# Altium PCB PCB_C20003-A.PcbDoc (part 1 of 2)
Units mil, origin at the board's own origin, x right, y up, seen from the top; angles counter-clockwise.
Board outline 2450.31 x 1640 mil, 2 copper layers (Top, Bottom), stack 12.7 mil thick; 109 components, 60 nets, 279 pads, 480 vias.
Unrouted connection lines stored in the file: 1.
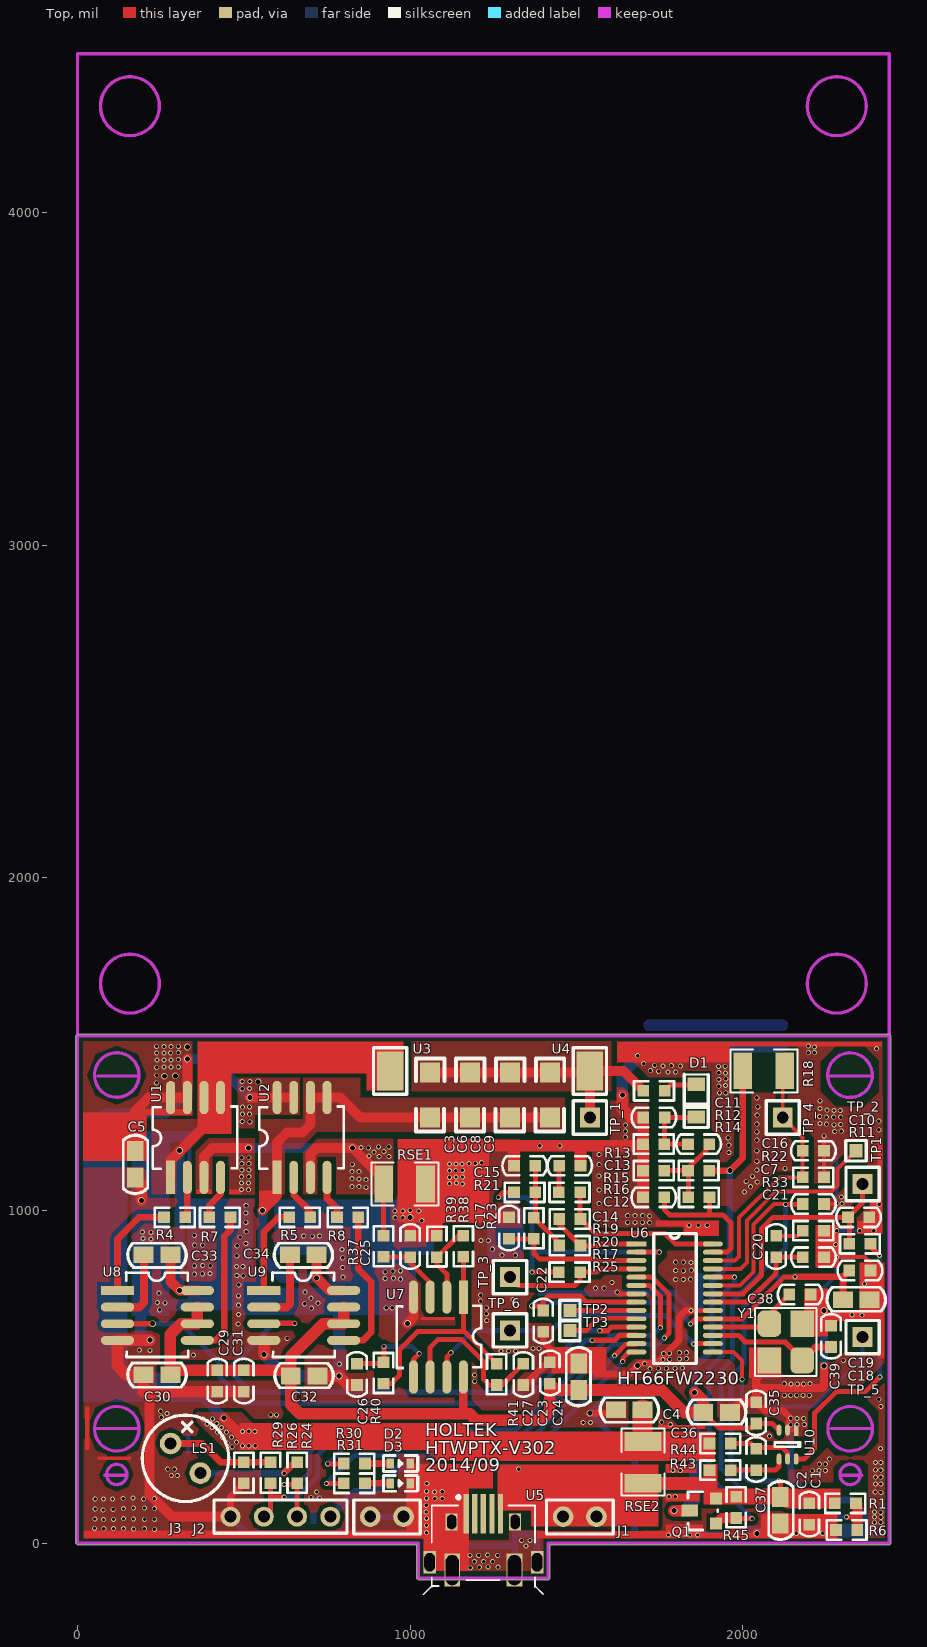
[diagram p0: Top view]
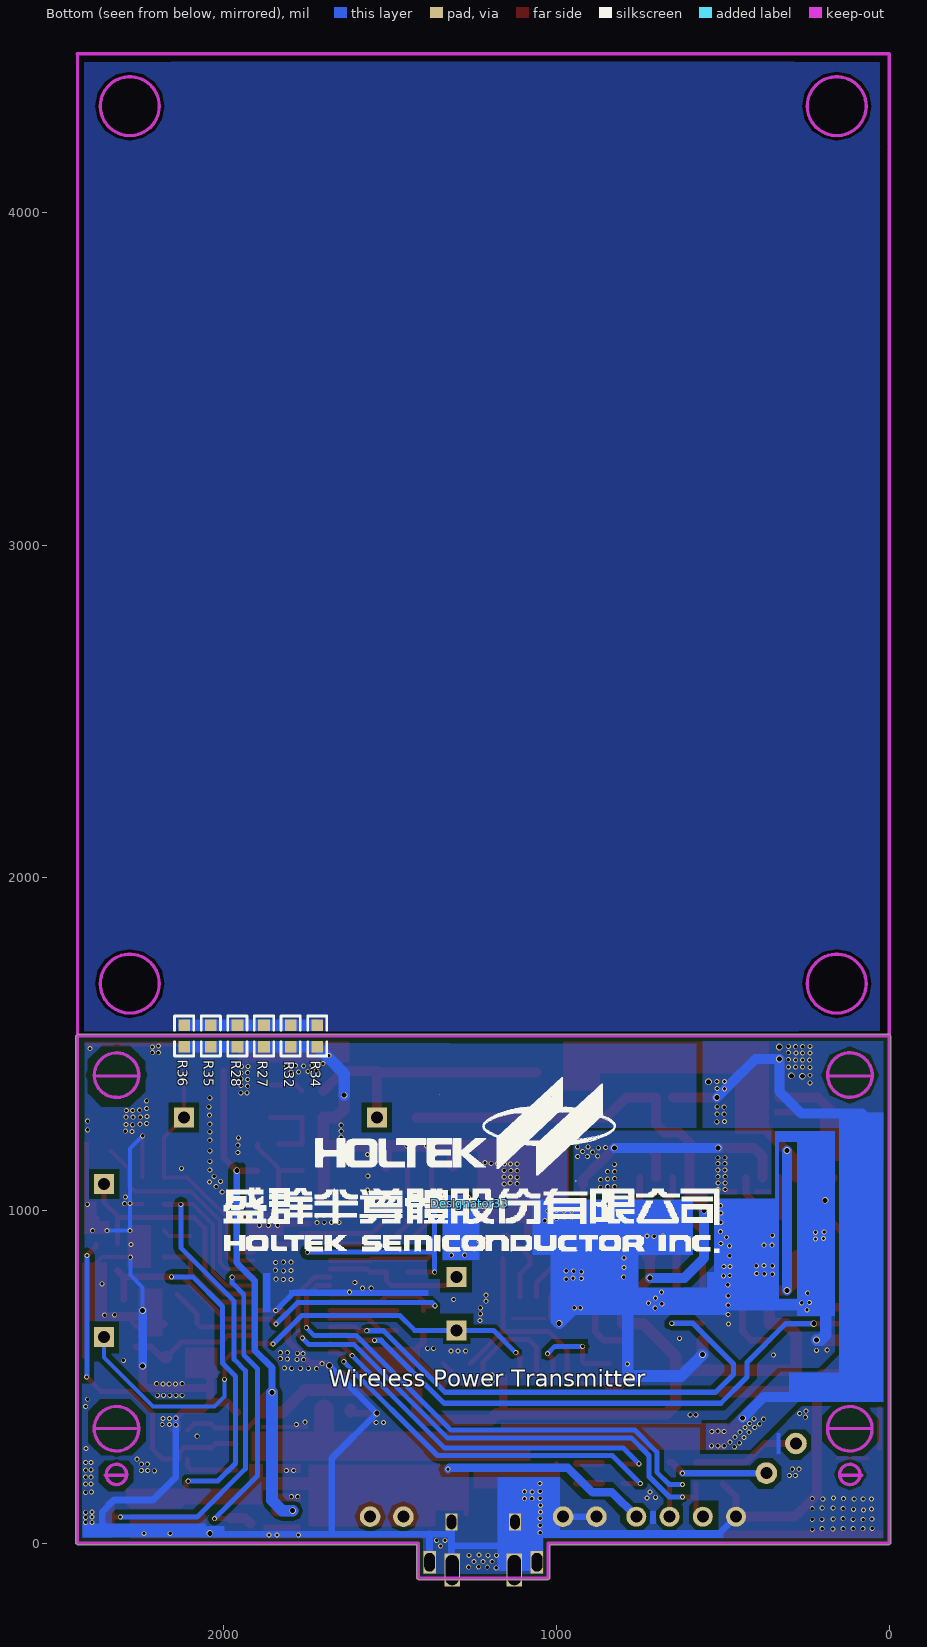
[diagram p1: Bottom view, seen from below]

## Layer stack, top to bottom
Top: signal copper 1.35
Dielectric: dielectric 10, FR-4, Dk 4.3
Bottom: signal copper 1.35

## Board outline
2445,1525 2440,1530 -0.31,1530 -5.31,1525 -5,0 0,-5 1020,-5 1020,-105 1025,-110 1415,-110 1420,-105 1420,-5 2440,-5 2445,0

## Design rules (kind name [scope] priority, off if disabled: settings)
Clearance Clearance_1 [All] p1: gap=8
Clearance [All] p2 off: gap=10
ComponentClearance "'Default' PADS rule_12" [All] p1 off: gap=6 collisioncheckmode=3 verticalgap=10 showdistances=FALSE
FlightTimeFalling "'Default' PADS rule_10" [All] p1: maximum=10.00
FlightTimeRising "'Default' PADS rule_9" [All] p1: maximum=10.00
HoleSize [All] p1: absolutevalues=TRUE maxlimit=100 minlimit=2 maxpercent=80.000 minpercent=20.000
HoleToHoleClearance [All] p1 off: gap=1 allowstackedmicrovias=TRUE
MaxMinImpedance "'Default' PADS rule_8" [All] p1: minimum=50.00 maximum=150.0
MinimumSolderMaskSliver [All] p1 off: minsoldermaskwidth=1
NetAntennae [All] p1: netantennaetolerance=2
ParallelSegment "'Default' PADS rule_7" [All] p1: limit=1000 gap=200
ParallelSegment "'Default' PADS rule_6" [All] p2: limit=1000 gap=200
PasteMaskExpansion [All] p1: expansion=2
PlaneClearance "'Default' PADS rule_14" [All] p1: clearance=12
PlaneConnect "Power Plane Connect Style - from global settings" [All] p1: planeconnectstyle=Direct reliefexpansion=20 reliefentries=4 reliefconductorwidth=15 reliefairgap=10
PolygonConnect [All] p1: connectstyle=Direct reliefconductorwidth=10 reliefentries=2 polygonreliefangle="45 Angle"
RoutingLayers "'Default' PADS rule_3" [All] p1: top layer_v5=TRUE bottom layer_v5=TRUE
RoutingPriority "'Default' PADS rule_2" [All] p1: routingpriority=3
RoutingTopology "'Default' PADS rule" [All] p1: topology=Shortest
RoutingVias "'Default' PADS rule_4" [All] p1: holewidth=17 width=15 viastyle="Through Hole" minholewidth=10 minwidth=8 maxholewidth=22 maxwidth=20
SMDToCorner "'Default' PADS rule_16" [All] p1 off: distance=100000
SMDToPlane "'Default' PADS rule_17" [All] p1: distance=60000
SilkToSilkClearance [All] p1 off: silktosilkclearance=2
SilkscreenOverComponentPads [All] p1 off: minsilkscreentomaskgap=1
SolderMaskExpansion [All] p1 off: expansion=1
TestPointUsage [All] p1: valid=0 allowmultiple=FALSE
Testpoint [All] p1: side=15 testpointundercomponent=TRUE minsize=10 maxsize=100 preferedsize=30 minholesize=0 maxholesize=40 preferedholesize=20 testpointgrid=1 style=1021 order=0-112345678
Width "'Default' PADS rule_13" [All] p1: maxlimit=120 minlimit=6 preferedwidth=12
11 further rules are at their usual default settings.

## Components (designator, comment, footprint, x,y, rotation, side; value= is the part's Value field where it differs from the comment)
C1 "0.1uF/25v" C0603-2 2200,120 r270 top
C2 "10uF/10v" C0805 2120,100 r270 top
C3 "104/50v_NPO" C1206 1060,1280 r90 top
C4 "10uF/10v" C0805 1660,395 r180 top
C5 "10uF/10v" C0805 180,1140 r270 top
C6 "104/50v_NPO" C1206 1180,1280 r90 top
C7 "0.1uF/25v" C0603-2 2180,1020 r0 top
C8 "104/50v_NPO" C1206 1300,1280 r90 top
C9 "104/50v_NPO" C1206 1420,1280 r90 top
C10 "0.1uF/25v" C0603-2 2380,980 r180 top
C11 "5.6n/25v" C0603-2 1835,1200 r0 top
C12 "4.7n/10v" C0603-2 1700,1040 r0 top
C13 "10n/25v" C0603-2 1765,1280 r180 top
C14 "100n/10v" C0603-2 1512,1135 r180 top
C15 "4.7n/10v" C0603-2 1312,1135 r0 top
C16 "0.1uF/25v" C0603-2 2180,1180 r0 top
C17 "100n/10v" C0603-2 1297,980 r270 top
C18 "10uF/10v" C0805 2340,739 r0 top
C19 "0.1uF/25v" C0603-2 2320,820 r0 top
C20 "472/16v" C0603-2 2100,860 r90 top
C21 "220PF/16v" C0603-2 2180,860 r0 top
C22 "0.1uF/25v" C0603-2 1400,700 r270 top
C23 "0.1uF/25v" C0603-2 1420,480 r90 top
C24 "10uF/10v" C0805 1500,500 r90 top
C25 "10n/25v" C0603-2 1000,860 r90 top
C26 "4.7n/10v" C0603-2 840,540 r270 top
C27 "0.1u/10v" C0603-2 1340,540 r270 top
C29 "0.1uF/25v" C0603-2 420,520 r270 top
C30 "10uF/10v" C0805 240,500 r180 top
C31 "0.1uF/25v" C0603-2 500,520 r270 top
C32 "10uF/10v" C0805 680,510 r0 top
C33 "0.1uF/50v" C0805 240,860 r180 top
C34 "0.1uF/50v" C0805 680,860 r180 top
C35 "0.1uF/25v" C0603-2 2040,360 r90 top
C36 "10uF/10v" C0805 1920,400 r0 top
C37 "0.1uF/25v" C0603-2 2040,220 r90 top
C38 "10p/10v" C0603-2 2140,748 r0 top
C39 "10p/10v" C0603-2 2265,590 r90 top
D1 "BAS16" SOD323-1 1860,1380 r90 top
D2 "LED(G)" LED_SMD0603 940,240 r0 top
D3 "LED(B)" LED_SMD0603 940,180 r0 top
Designator33 "Comment" HOLTEK_MARK 1260,1020 r180 bottom
J1 "VDD" CON2 1460,80 r0 top
J2 "GND" CON2 880,80 r0 top
J3 "OCDS" CON4 760,80 r180 top
LS1 "SPEAKER" BUZZER3 280,300 r135 top
Q1 "AO3401" SOT-23_1 1920,60 r90 top
R1 "100k" R0603-2 2340,120 r180 top
R4 "10" R0603-2 260,980 r0 top
R5 "10" R0603-2 700,980 r180 top
R6 "47k" R0603-2 2280,40 r0 top
R7 "10" R0603-2 460,980 r180 top
R8 "10" R0603-2 780,980 r0 top
R11 "1k" R0603-2 2320,900 r0 top
R12 "82K" R0603-2 1835,1120 r0 top
R13 "1.5k" R0603-2 1765,1360 r180 top
R14 "6.8K" R0603-2 1900,1040 r180 top
R15 "33K" R0603-2 1700,1200 r0 top
R16 "100K" R0603-2 1700,1120 r0 top
R17 "10K" R0603-2 1512,895 r180 top
R18 "104  Temp." R1210 2000,1420 r0 top
R19 "100K" R0603-2 1447,1055 r0 top
R20 "2M" R0603-2 1512,975 r180 top
R21 "10K" R0603-2 1312,1055 r0 top
R22 "1k/1%" R0603-2 2180,1100 r0 top
R23 "100K" R0603-2 1372,915 r90 top
R24 "open" R0603-2 660,180 r90 top
R25 "680K" R0603-2 1447,815 r0 top
R26 "open" R0603-2 580,180 r90 top
R27 "0R" R0603-2 1879,1493 r90 bottom
R28 "0R" R0603-2 1959,1493 r90 bottom
R29 "open" R0603-2 500,244 r270 top
R30 "1k" R0603-2 800,240 r0 top
R31 "1k" R0603-2 800,180 r0 top
R32 "0R" R0603-2 1799,1493 r90 bottom
R33 "130k" R0603-2 2180,940 r0 top
R34 "0R" R0603-2 1719,1493 r90 bottom
R35 "0R" R0603-2 2039,1493 r90 bottom
R36 "0R" R0603-2 2119,1493 r90 bottom
R37 "3k" R0603-2 920,925 r270 top
R38 "20k" R0603-2 1160,925 r270 top
R39 "1k" R0603-2 1080,860 r90 top
R40 "10k" R0603-2 920,480 r90 top
R41 "10k" R0603-2 1260,540 r270 top
R43 "1R" R0603-2 1900,220 r0 top
R44 "1R" R0603-2 1900,300 r0 top
R45 "100k" R0603-2 1980,140 r270 top
RSE1 "0.05R" R1210 920,1080 r0 top
RSE2 "0.02R" R1210 1700,180 r90 top
TP1 "Test Pad" TEST_PAD3 2340,1180 r0 top
TP2 "Test Pad" TEST_PAD3 1480,700 r90 top
TP3 "Test Pad" TEST_PAD3 1480,640 r90 top
TP_1 "TestPoint" CON1 1540,1280 r90 top
TP_2 "TestPoint" CON1 2360,1080 r90 top
TP_3 "TestPoint" CON1 1300,800 r90 top
TP_4 "TestPoint" CON1 2120,1280 r90 top
TP_5 "TestPoint" CON1 2360,620 r90 top
TP_6 "TestPoint" CON1 1300,640 r90 top
U1 "AP4920GM-HF" SOP8-150 280,1100 r90 top
U2 "AP4920GM-HF" SOP8-150 600,1100 r90 top
U3 "WPC_L" TEST_PAD2 940,1420 r0 top
U4 "WPC_L" TEST_PAD2 1540,1420 r0 top
U5 "USB_MICRO_2" USB_Micro_2 1168.82,88.5 r0 top
U6 "HT66FW2230" SSOP28_150 1680,900 r0 top
U7 "HT9252" SOP8-150 1160,740 r270 top
U8 "TI TPS28225" SOP8-150 120,760 r0 top
U9 "TI TPS28225" SOP8-150 560,760 r0 top
U10 "TI INA199_SC70-6" SC70 2160,340 r0 top
Y1 "20MHz" XTAL_3.2*2.5_1 2080,660 r0 top

## Footprints (in the part's own frame and the unit in brackets; to place one, negate y for a bottom-side part, rotate by r counter-clockwise, add the part's x,y. Pads: shape width x height; smd on the part's side, far side on the other; paste and mask are expansions set on the pad)
BUZZER3 [mil]
  round 65 hole 36: 1(0,0) 2(-125.98,0)
  silkscreen extent -193,-130 67,130
C0603-2 [mil]
  rect 35x35 smd: 1(0,0) 2(64,0)
  silkscreen extent -35,-29 99,29
C0805 [mil]
  rect 60x50 smd: 1(-39,-7) 2(41,-7)
  silkscreen extent -87,-42 89,31
C1206 [mil]
  rect 60x60 smd: 1(0,0) 2(135,0)
  silkscreen extent -42,-43 178,43
CON1 [mil]
  rect 60x60 hole 36: 1(0,0)
  silkscreen extent -50,-50 50,50
CON2 [mil]
  round 62 hole 36: 1(0,0) 2(100,0)
  silkscreen extent -50,-52 150,50
CON4 [mil]
  round 60 hole 36: 1(0,0) 2(100,0) 3(200,0) 4(300,0)
  silkscreen extent -50,-50 350,50
HOLTEK_MARK [mil]
  silkscreen extent -740,-146 750,380
LED_SMD0603 [mil]
  rect 23x30 smd: 1(0,0) 2(60,0)
  silkscreen extent -20,-24 83,24
R0603-2 [mil]
  rect 35x35 smd: 1(0,0) 2(64,0)
  silkscreen extent -28,-29 92,29
R1210 [mil]
  rect 56x110 smd: 1(0,0) 2(125.98,0)
  silkscreen extent -37,-65 165,65
SC70 [mm]
  rect 0.35x0.85 smd: 1(0,0)
  oval 0.35x0.85 smd: 2(-0.65,0) 3(-1.3,0) 4(-1.3,-2.2) 5(-0.65,-2.2) 6(0,-2.2)
  silkscreen extent -1.63,-1.26 0.32,-0.94
SOD323-1 [mm]
  rect 1x1.35 smd: 1(0,0) 2(-2.5,0)
  silkscreen extent -3.3,-0.91 0.76,0.91
SOP8-150 [mil]
  rect 100x27 smd: 1(0,0)
  oval 100x27 smd: 2(0,-50) 3(0,-100) 4(0,-150) 5(240,-150) 6(240,-100) 7(240,-50) 8(240,0)
  silkscreen extent 25,-200 213,54
SOT-23_1 [mil]
  rect 36x36 smd: 1(0,0) 3(75,0)
  rect 36x50 smd: 2(38,80)
  silkscreen extent -20,-5 95,85
SSOP28_150 [mil]
  rect 60x15 smd: 1(0,0)
  oval 60x15 smd: 2(0,-25) 3(0,-50) 4(0,-75) 5(0,-100) 6(0,-125) 7(0,-150) 8(0,-175) 9(0,-200) 10(0,-225) 11(0,-250) 12(0,-275) 13(0,-300) 14(0,-325) 15(230,-325) 16(230,-300) 17(230,-275) 18(230,-250) 19(230,-225) 20(230,-200) 21(230,-175) 22(230,-150) 23(230,-125) 24(230,-100) 25(230,-75) 26(230,-50) 27(230,-25) 28(230,0)
  silkscreen extent 52,-360 180,32
TEST_PAD2 [mm]
  rect 2x3 smd: 1(0,0)
  silkscreen extent -1.27,-1.78 1.27,1.78
TEST_PAD3 [mm]
  rect 1x1 smd: 1(0,0)
  silkscreen extent -0.78,-0.78 0.78,0.78
USB_Micro_2 [mm]
  rect 0.4x3 smd: 1(0,0) 2(0.65,0) 3(1.3,0) 4(1.95,0) 5(2.6,0)
  rect 0.9x1.3 hole 0.7 slot 1.1 at 90 deg unplated: MH1(3.725,-0.615) MH2(-1.125,-0.615)
  rect 0.95x1.7 hole 0.8 slot 1.4 at 90 deg unplated: MH3(5.4,-3.695) MH4(-2.8,-3.695)
  rect 1.2x2.5 hole 1 slot 2.3 at 90 deg unplated: MH5(3.675,-4.295) MH6(-1.075,-4.295)
  silkscreen extent -3.27,-6.14 5.87,1.39
XTAL_3.2*2.5_1 [mm]
  rrect50% 1.8x2 smd: 1(0,0) 3(2.5,-2.8)
  rect 1.8x2 smd: 2(0,-2.8) 4(2.5,0)
  silkscreen extent -1.1,-4 3.6,1.22

## Part data
C1 C2 C4 C5 C7 C10 C11 C12 C13 C14 C15 C16 C17 C18 C19 C20 C21 C22 C23 C24 C29 C30 C31 C32 C35 C36 C37: library part C
C3 C6 C8 C9: library part C_2
C25 C26 C27 C38 C39: library part C_0
C33 C34: library part C_1
D1: library part DIODE
D2 D3: library part LED
J1 J2: library part CON2
J3: library part "4 HEADER"
Q1: library part "MOSFET P DGS_0"
R1 R4 R5 R6 R7 R8 R11 R12 R13 R14 R15 R16 R17 R18 R19 R20 R21 R22 R23 R24 R25 R26 R27 R28 R29 R30 R31 R32 R33 R34 R35 R36 RSE1: library part RESISTOR
R37 R38 R39 R40 R41 R43 R44 R45: library part R_0603
RSE2: library part R_1210
U6: library part NewHT45F3U
U7: "2 pair OPA"
U10: library part INA199_0
Y1: library part XM/SM, "4 pads"

## Via types
v1: diameter 15, hole 10, Top to Bottom, tented both sides, 451 vias
v2: diameter 20, hole 15, Top to Bottom, tented both sides, 29 vias

## Nets (pads, with @x,y where several pads share a name; then routed paths per layer and width w, separated by ;. In a path a pad name is that pad's centre, name@x,y a point inside that pad or via, vN(x,y) a via of type N, cw(c..) or ccw(c..) an arc to the next point about the centre after c; other vN are vias at no path point)
5V: C1.1 C2.1 C18.1 C19.1 C22.1 J1.1 J1.2 J3.1 Q1.3 R1.2 R43.1 R45.1 RSE2.1 U5.5 U6.8 U6.19 | length 4142.1
  Top w15: U5.5@1271.18,88.5 1271.18,180.18 1314,223 v1(1326,223) ; v1(1365,714) C22.1@1400,714 ; C22.1@1400,700 C22.1@1400,714 ; U6.8@1680,725 1530,725 1512,743 1415,743 1400,728 C22.1@1400,714 ; v1(1843,659) 1858,674 1909,674 U6.19@1910,675 1910.5,674.5 1998,674.5 ; 1998,674.92 2124.08,801 v1(2157,801) ; v1(2107,187) 2113,181 C2.1@2113,139
  Top w20: v1(2157,801) 2301,801 ; C18.1@2301,732 2301,801 ; C19.1@2320,820 2301,801
  Top w25: v1(1326,223) 1657,223 RSE2.1@1700,180
  Top w30: R43.1@1900,220 1900,180 1900,155 Q1.3@1920,135 ; R45.1@1975,135 R45.1@1980,140 R45.1@1981,140 ; R45.1@1981,139 C2.1@2113,139 C2.1@2112,140 ; C2.1@2132,120 C1.1@2200,120 R1.2@2276,120
  Top w40: RSE2.1@1700,180 1900,180
  Bottom w15: v1(1365,714) 1365,715 1374,724 1778,724 v1(1843,659) ; v1(2107,187) 2018,187 1965,240 1965,502 2004,541 2004,712 2093,801 v1(2157,801)
  Bottom w25: J3.1@767,80 J3.1@760,80 833,153 891,153 965,227 1322,227 v1(1326,223)
CMP_N: C17.2 R23.1 U6.3 | length 436.1
  Top w15: C17.2@1297,916 1298,915 R23.1@1372,915 1372,871 1388,855 1555,855 1560,850 U6.3@1680,850
CMP_O: R25.2 TP_3.1 U6.4 | length 425.1
  Top w15: TP_3.1@1300,800 1325,775 1495,775 1511,791 R25.2@1511,815 1561,815 1571,825 U6.4@1680,825
CMP_P: R21.1 R25.1 U6.2 | length 901.7
  Top w15: v1(1265,1040) 1280,1055 R21.1@1312,1055 ; v1(1366,815) R25.1@1447,815 ; U6.2@1680,875 v1(1749,875)
  Bottom w15: v1(1265,1040) 1348,1040 1366,1022 1366,875 ; v1(1366,815) 1366,875 ; v1(1749,875) 1366,875
DETECTVIN: C7.1 R1.1 R6.2 U6.23 | length 1881.7
  Top w12: U6.23@1910,775 1992,775 2032,815 2032,958 2094,1020 v1@2129,1020
  Top w15: v1(2129,1019) 2179,1019 C7.1@2180,1020 ; v1(2311,79) 2344,79 ; R1.1@2340,120 R1.1@2344,116
  Top w30: R6.2@2344,40 2344,79 R1.1@2344,116
  Bottom w15: v1(2129,1019) 2129,888 1969,728 1969,553 1935,519 1935,224 2080,79 v1(2311,79)
FODTEMP: C16.1 R18.2 R22.1 TP_4.1 U6.26 | length 789.4
  Top w12: U6.26@1910,850 1977,850 1989,862 1989,979 2110,1100 R22.1@2180,1100 C16.1@2180,1180 2180,1220 TP_4.1@2120,1280 2120,1414.02 R18.2@2125.98,1420
GND: C1.2 C2.2 C4.2 C5.2 C7.2 C10.1 C12.1 C13.2 C14.1 C15.1 C16.2 C17.1 C18.2 C19.2 C21.2 C22.2 C23.2 C24.2 C25.2 C26.2 C27.2 C29.2 C30.2 C31.2 C32.2 C35.2 C36.2 C38.2 C39.2 D2.2 D3.2 J2.1 J2.2 J3.4 R6.1 R15.1 R16.1 R22.2 R27.1 R27.2 R28.1 R28.2 R29.2 R32.1 R32.2 R33.2 R34.1 R34.2 R35.1 R35.2 R36.1 R36.2 R39.2 RSE1.2 U5.1 U5.MH1 U5.MH2 U5.MH3 U5.MH4 U5.MH5 U5.MH6 U6.7 U6.20 U7.4 U8.4 U9.4 U10.1 U10.2 Y1.2 Y1.4 | length 14646.8
  Top w12: C2.2@2113,59 C2.2@2116,56 ; v1(2144,376) 2134.41,366.41 2134.41,356 U10.2@2134.41,340 U10.1@2160,340 ; Y1.4@2178.43,660 2204,685.57 C38.2@2204,748 ; C7.2@2244,1020 2280,1020 v1(2282,1022) ; R22.2@2244,1100 C16.2@2244,1180 v1(2244,1225) ; C39.2@2265,654 2286,675 2328,675 2358,675 2360,675 2364.5,679.5 2381,696 C18.2@2381,732 2384,735 C19.2@2384,820 2384,842 2366,860 v1(2281,860) C21.2@2244,860 R33.2@2244,940 v1(2282,940) ; v1(2351,940) 2380,969 C10.1@2380,980
  Top w15: D2.2@1000,240 D3.2@1000,180 v1(1050,180) 1168.82,180 ; U5.1@1168.82,88.5 1168.82,180 ; 1169,180 1168.82,180 ; v1(1622,755) 1627,750 U6.7@1680,750 ; v1(1844,700) U6.20@1910,700 ; Y1.4@2178.43,660 Y1.4@2184,665.57
  Top w20: J3.4@460,80 460,140 R29.2@500,180 ; J2.2@980,80 1000,100 D3.2@1000,180 ; U5.MH2@1124.53,64.29 1124.53,179.47 ; C27.2@1340,476 1344,476 1412,544 C23.2@1420,544 ; C22.2@1400,636 1400,605 1420,585 C23.2@1420,544 ; C23.2@1417,544 C23.2@1420,544 ; C23.2@1420,543 1505,543 C24.2@1507,541 1529,541 1561,509 1658,509 v2(1682.86,533.86) 1690,541 1705,541 1721,541 1739,541 1755,557 1765,567 1774,576 1808,610 1808,680 1828,700 v1(1844,700) ; v2(1540,391) 1615,391 C4.2@1619,387 ; C35.2@2040,424 2066,398 2122,398 v1(2144,376) ; Y1.4@2178.43,660 2184.43,654 C39.2@2265,654
  Top w25: C36.2@1961,393 1992,424 C35.2@2040,424 2040,467 ; Y1.2@2080,549.76 2080,534 2040,494 2040,467 ; Y1.4@2204,685.57 2218.43,700 v2(2244,700) ; v2(2244,533) 2244,472 2239,467 2202,467 2183,467 2164,467 2145,467 2125,467 2040,467
  Top w30: 217,456 217,147 230.5,133.5 245.5,118.5 284,80 J3.4@460,80 ; v2(992,661) 1010,679 U7.4@1010,740 ; v2(2042,30) 2084,30 C2.2@2113,59 ; C2.2@2116,56 C1.2@2200,56 2237,56 2251.5,41.5 2253,40 R6.1@2280,40
  Top w35: C5.2@173,1099 192,1080 v2(192,1031) ; 198,456 217,456 C29.2@420,456 C31.2@500,456 ; 199,457 C30.2@199,507 147,507 120,534 U8.4@120,610 v2@217,610 ; U9.4@560,610 561,609 v2(561,567) ; C32.2@721,503 v2(786,503) 813,476 C26.2@840,476 ; v2(1000,980) 1000,979 C25.2@1000,924 R39.2@1080,924 1080,983 ; C17.1@1297,980 1083,980 1080,983 ; C15.1@1312,1135 1312,1194 ; C14.1@1512,1135 1512,1191 1516,1195 ; C4.2@1619,395 C4.2@1619,402 ; v2(1638,1347) 1638,1306 1664,1280 C13.2@1701,1280 R15.1@1701,1201 ; C12.1@1700,1040 R16.1@1700,1120 R15.1@1700,1200 1695,1195 1516,1195 ; Y1.2@2080,549.76 Y1.2@2080,551.83 ; 1080,983 1045.98,1017.02 RSE1.2@1045.98,1080 1049,1083.02 1049,1145 1099,1195 v1(1390,1195) v1(1450,1195) 1516,1195
  Bottom w12: v2@2041,29 v2(2042,30) ; v2(2244,700) 2244,769 2281,806 v1(2281,860) ; v1(2244,1225) 2282,1187 v1(2282,1022) v1(2282,940) v1(2351,940)
  Bottom w15: v1(1622,755) 1789,755 v1(1844,700)
  Bottom w20: J3.4@460,80 510.42,29.58 1049,29.58 1058.58,29.58 ; J2.1@880,80 J2.2@980,80 1048,80 1049,80 1108.82,80 U5.MH2@1124.53,64.29 1124.53,-7 ; U5.MH4@1058.58,-56.97 1058.58,29.58 ; 1058.58,78.58 1058.58,75 1058.58,54 1058.58,32 1058.58,29.58 ; 1123.11,29.58 1058.58,29.58 ; U5.MH6@1124.53,-78.03 1124.53,-7 ; U5.MH1@1313.5,62.32 U5.MH1@1315.47,64.29 1315.47,28 ; U5.MH5@1315.47,-78.03 1315.47,-7 ; U5.MH3@1381.42,-56.97 1381.42,27 ; 1381.42,28.58 1381.42,27 ; v2(1682.86,533.86) v2(1540,391) 1675,256 1675,27 ; v2@2041,29 2039,27 1864,27 1840,27 1776,27 1675,27 ; v2(2042,30) v1(2161,30) v1(2240,30) 2335,30 2365,60 2365,95 2330,130 2213,130 2144,199 v1(2144,356) v1(2144,376) ; 1124.53,-7 1315.47,-7 ; 1315.47,-7 1315.47,28 ; 1315.47,28 1316.47,27 1381.42,27 ; 1381.42,27 1675,27
  Bottom w25: v2(2244,533) v2(2244,700)
  Bottom w35: 190.5,716 190.5,626.5 206,611 v2(218,611) ; v2(192,1031) 192,936 192,916 192,717.5 240,717.5 247,717.5 263,717.5 484,717.5 683,717.5 702,717.5 703,717.5 723,717.5 928,717.5 935.5,717.5 936.5,716.5 945.5,707.5 v2(992,661) 1000,669 1000,979 v2(1000,980) ; v2(561,567) 625,503 v2(786,503) 786,539 786,715.5 ; v2(1638,1347) 1638,1412 1685,1459 1688,1462 R34.1@1719,1493 R32.1@1799,1493 R27.1@1879,1493 R28.1@1959,1493 R35.1@2039,1493 R36.1@2119,1493 ; R34.2@1719,1557 R32.2@1799,1557 R27.2@1879,1557 R28.2@1959,1557 R35.2@2039,1557 R36.2@2119,1557
  other v1: 1181,-74 1208,-72 1264,-72 1234,-71 1193,-55 1221,-55 1248,-55 1180,-36 1206,-36 1263,-36 1233,-35 1348,-8 1335,9 1360,9 1776,25 1840,25 1864,25 1049,32 231,42 169,43 79,44 108,44 138,44 201,44 51,45 1049,54 2396,63 2415,63 78,71 108,72 202,72 231,72 52,73 168,73 138,74 1049,75 2415,78 2396,79 2415,93 1048,94 2396,94 77,100 107,102 53,103 138,104 231,104 168,106 201,106 1048,114 53,133 78,133 105,133 199,133 137,134 231,134 1074,134 1096,134 1049,135 167,136 728,136 702,138 1778,140 1797,140 2415,153 719,154 1073,154 2398,154 1096,155 1049,156 2399,178 2415,178 2399,199 2415,199 282,204 300,204 2209,218 1790,219 1812,219 2229,219 2248,219 2415,220 2399,221 271,223 291,223 2230,238 2248,238 2399,243 2415,243 2261,253 2414,285 2080,322 1782,357 2163,357 2185,357 1520,363 1542,363 1756,364 2163,375 2183,375 252,379 581,386 598,386 269,390 250,397 2415,411 2409,433 2125,445 2144,445 2162,445 2181,445 2200,445 2145,479 2164,479 2183,479 2125,480 2202,480 1194,487 1194,506 1721,525 1746,526 1770,526 1796,526 1818,527 787,539 1705,540 2302,550 1760,552 1780,553 1809,554 1830,555 348,566 1762,570 1779,571 1809,573 1830,573 1273,578 1296,578 1317,578 218,580 186,581 1369,586 1387,586 630,616 483,659 1230,670 2358,686 2328,687 484,688 1229,690 247,702 703,707 928,708 946,708 1229,708 484,716 683,720 723,722 263,723 240,724 1212,728 1309,733 702,737 484,744 1212,746 245,752 684,755 1557,767 1583,767 485,777 2366,780 1606,784 1798,793 1821,793 971,794 1843,794 925,796 950,797 798,800 498,804 479,805 351,809 375,810 398,811 925,816 948,818 971,819 1821,819 1798,820 1845,821 797,829 478,832 497,832 351,834 399,834 376,835 1844,844 1798,845 1821,845 797,858 479,864 1276,866 1316,866 795,883 1247,884 480,894 352,896 376,896 2279,898 506,901 1213,910 1235,910 221,915 197,916 489,920 706,923 680,924 728,924 351,926 221,935 195,936 507,937 2394,940 1838,956 1866,956 1893,956 1720,964 506,965 1654,965 1676,965 1698,965 1035,970 955,979 978,979 1720,984 1654,985 1676,985 1699,985 506,993 954,999 978,999 1026,999 1000,1001 507,1015 2410,1019 1568,1021 2298,1021 2296,1041 2005,1056 1568,1062 2023,1072 1157,1080 1118,1081 1139,1083 2043,1086 2010,1088 1118,1100 1138,1101 1157,1101 2029,1103 1567,1104 1118,1120 1137,1120 1157,1121 2042,1122 2127,1127 1568,1138 1118,1140 1138,1140 1156,1140 1177,1141 1196,1142 1215,1144 2042,1148 1568,1169 1958,1175 2042,1180 1958,1197 2042,1212 1956,1219 1647,1221 2042,1237 2276,1238 1647,1239 2296,1239 2409,1243 1647,1257 2274,1258 2294,1259 2042,1260 2252,1260 2232,1262 2409,1269 2251,1281 2273,1281 2294,1281 2231,1283 2043,1287 2274,1301 2293,1301 2253,1302 2232,1307 2045,1312 2232,1330 2042,1339 1930,1354 1949,1354 1928,1374 1948,1376 1928,1394 1949,1396 1948,1414 1928,1415 1775,1417 1798,1417 1747,1419 1722,1421 1927,1434 1947,1434 1760,1435 1812,1435 1785,1436 1735,1437 1702,1442 1684,1466 2197,1475 2215,1475 2402,1487 2215,1492 2197,1495
IDEMO: R37.1 RSE1.1 U1.3 U2.3 | length 1026.6
  Top w15: R37.1@920,925 RSE1.1@920,1080
  Top w30: U1.3@380,1100 380,1163 406,1189 v2(514,1189) ; U2.3@700,1100 700,1170 719,1189 v2(826,1189) 838.5,1176.5 863.5,1151.5 920,1095 RSE1.1@920,1080
  Bottom w30: v2(514,1189) v2(826,1189)
  other v1: 514,1063 492.86,1063.5 867,1070 825,1072 846,1072 493,1083 514,1083 867,1093 846,1095 825,1096 493,1102 515,1102 825,1117 846,1117 494,1122 515,1122 826,1139 494,1141 515,1141 494,1159 515,1159 907,1163 936,1163 876,1164 891,1176 921,1178 874,1189 852,1190 905,1192 936,1192
IDEMOINT1: TP_6.1 U6.16 U7.7 | length 995.4
  Top w15: U7.7@1110,547 U7.7@1110,500 1110,561 v1(1122,573) ; v1(1852,599) 1853,600 U6.16@1910,600
  Bottom w15: v1(1122,573) 1189,640 TP_6.1@1300,640 1426,640 1471,685 1766,685 v1(1852,599)
ISEN: C10.2 R11.1 TP_2.1 U6.22 | length 783.2
  Top w15: U6.22@1910,750 2000,750 2056,806 2056,946 2090,980 C10.2@2316,980 ; R11.1@2320,900 2320,976 C10.2@2316,980 ; TP_2.1@2360,1080 2360,1024 C10.2@2316,980
LHB: C33.1 U1.1 U1.5 U1.6 U3.1 U8.8 | length 1558.1
  Top w30: C33.1@279,867 279,788 v2(307,760) U8.8@360,760 ; U1.1@280,1100 280,1152 308,1180 380,1252 U1.6@380,1340 U1.5@430,1340 430,1433 461,1464 896,1464 U3.1@940,1420
  Bottom w30: v2(307,760) v2(307,1181)
LLG: R7.1 U8.5 | length 443.1
  Top w20: U8.5@360,610 414,610 441,637 441,923 460,942 R7.1@460,980
LUG: R4.1 U8.1 | length 321.9
  Top w20: U8.1@120,760 120,915 185,980 R4.1@260,980
NetC11_1: C11.1 C13.1 D1.2 R15.2 | length 245.7
  Top w15: R15.2@1764,1200 C11.1@1835,1200 ; R15.2@1765,1201 C13.1@1765,1280 1858.43,1280 D1.2@1860,1281.57
NetC11_2: C11.2 R12.1 R14.2 R16.2 | length 257.9
  Top w15: R16.2@1764,1120 R12.1@1835,1120 ; R14.2@1836,1040 1836,1119 R12.1@1835,1120 ; C11.2@1899,1200 1899,1191 1835,1127 R12.1@1835,1120
NetC14_2: C14.2 R19.1 | length 80.4
  Top w15: R19.1@1447,1055 1448,1056 C14.2@1448,1135
NetC15_2: C15.2 R17.2 R21.2 R23.2 | length 273.1
  Top w15: C15.2@1376,1135 R21.2@1376,1055 1376,983 R23.2@1372,979 1448,903 R17.2@1448,895
NetC20_2: C20.2 R33.1 | length 86.6
  Top w12: C20.2@2100,924 2164,924 R33.1@2180,940
NetC25_1: C25.1 R37.2 U7.3 | length 230.9
  Top w15: R37.2@920,861 999,861 C25.1@1000,860 ; C25.1@996,856 C25.1@1000,860 ; U7.3@1060,740 1060,783 1000,843 C25.1@1000,860
NetC26_1: C26.1 R40.2 U7.5 | length 322.2
  Top w15: C26.1@840,540 916,540 R40.2@920,544 921,545 v1(921,592) ; U7.5@1010,500 1010,553 v1(1027,570)
  Bottom w15: v1(921,592) 1005,592 v1(1027,570)
NetC27_1: C27.1 R41.2 U7.6 | length 492.4
  Top w15: U7.6@1060,500 1060,589 1083,612 1155,612 1221,546 1221,493 1238,476 R41.2@1260,476 1276,476 C27.1@1340,540
NetC33_2: C33.2 U8.2 | length 229.2
  Top w25: U8.2@120,710 186,710 200,724 200,866 C33.2@199,867
NetC34_2: C34.2 U9.2 | length 230.1
  Top w25: U9.2@560,710 629,710 639,720 C34.2@639,867
NetC37_1: C37.1 R43.2 U10.4 | length 171.9
  Top w15: R43.2@1964,220 C37.1@2040,220 2098,220 2108.82,230.82 U10.4@2108.82,253.39
NetC37_2: C37.2 R44.2 U10.5 | length 203.7
  Top w15: R44.2@1964,300 2024,300 C37.2@2040,284 2043.62,287.62 2118.92,287.62 2134.41,272.13 U10.5@2134.41,253.39
NetD1_1: D1.1 R13.1 | length 99
  Top w15: R13.1@1765,1360 1782,1377 D1.1@1857,1377
NetD2_1: D2.1 R30.2 | length 76
  Top w20: R30.2@864,240 D2.1@940,240
NetD3_1: D3.1 R31.2 | length 76
  Top w20: R31.2@864,180 D3.1@940,180
NetLS1_1: LS1.1 R26.2 R29.1 | length 329.2
  Top w20: LS1.1@280,300 374,300 430,244 R29.1@500,244 ; R29.1@494,244 R29.1@500,244 ; R26.2@580,244 R29.1@500,244
NetLS1_2: LS1.2 R24.2 | length 298.7
  Top w20: v1(621,211) 654,244 R24.2@660,244
  Bottom w20: LS1.2@374.98,211 v1(621,211)
NetQ1_1: Q1.1 R45.2 U6.24 | length 989.4
  Top w15: U6.24@1910,800 v1(1975,800) ; R45.2@1982,74 v1(2028,74)
  Top w30: Q1.1@1920,60 1936,76 R45.2@1980,76
  Bottom w15: v1(1975,800) 1975,783 1940,748 1940,566 1898,524 1898,204 v1(2028,74)
NetR4_2: R4.2 U1.2 | length 122.5
  Top w20: R4.2@324,980 330,986 U1.2@330,1100
NetR5_1: R5.1 U2.2 | length 148.7
  Top w20: U2.2@650,1100 650,1047 700,997 R5.1@700,980 R5.1@700,988
NetR7_2: R7.2 U1.4 | length 134.1
  Top w20: R7.2@396,980 396,1015.98 430,1049.98 U1.4@430,1100
NetR8_1: R8.1 U2.4 | length 132.4
  Top w20: U2.4@750,1100 750,1036 780,1006 R8.1@780,980
NetR11_2: R11.2 U10.6 | length 828.1
  Top w15: U10.6@2160.5,253.89 U10.6@2160,253.39 2184.39,253.39 2215,284 2215,390 2281,456 2368,456 v1(2412,500) ; R11.2@2384,900 2384,892 v1(2411,865)
  Bottom w15: v1@2411,500 v1(2411,865)
NetR30_1: R30.1 U6.13 | length 1124.5
  Top w15: v1(752,239) R30.1@799,239 ; v1(1614,564) 1647.97,598 1678,598 U6.13@1680,600
  Bottom w15: v1(752,239) 800,287 1337,287 v1(1614,564)
NetR31_1: R31.1 U6.14 | length 1153.8
  Top w15: v1(748,180) R31.1@800,180 ; v1(1639,546) 1639.5,546.5 1639.5,556.5 1658,575 U6.14@1680,575
  Bottom w15: v1(748,180) 832,264 1357.53,264 1639,545.47 v1(1639,546)
NetR38_1: R38.1 R39.1 U7.2 | length 239.4
  Top w15: U7.2@1110,740 1110,809 1080,839 R39.1@1080,860 1145,925 R38.1@1160,925
NetR38_2: R38.2 R40.1 R41.1 U7.1 | length 711.1
  Top w15: R40.1@920,480 943,480 968,505 968,582 1022,636 1164,636 ; R38.2@1160,856 U7.1@1160,740 1160,640 1164,636 ; R41.1@1260,540 1164,636
NetTP1_1: TP1.1 U6.25 | length 679.6
  Top w12: U6.25@1910,825 1993,825 2012,844 2012,970 2099,1057 2266,1057 2285,1076 2285,1125 TP1.1@2340,1180
NetTP2_1: TP2.1 U6.9 | length 200
  Top w15: TP2.1@1480,700 U6.9@1680,700
NetTP3_1: TP3.1 U6.10 | length 215.7
  Top w15: TP3.1@1480,640 1530,640 1566.5,676.5 1678.5,676.5 U6.10@1680,675
NetTP_5_1: TP_5.1 U6.15 | length 704.1
  Top w12: U6.15@1910,575 1972,575 1998,549 v1(1998,493)
  Bottom w12: v1(1998,493) 1998,441 2028,411 2213,411 2360,558 TP_5.1@2360,620
OCDSCK: J3.2 R24.1 U6.6 | length 1681.5
  Top w15: v1(621,177) R24.1@657,177 ; J3.2@660,80 R24.1@660,180 R24.1@664,180 ; U6.6@1680,775 1720,775 1752,743 v1(1752,648)
  Bottom w15: v1(621,177) 661,177 698,214 698,274 764,340 1317,340 1601,624 1728,624 v1(1752,648)
OCDSDA: J3.3 R26.1 U6.5 | length 1783
  Top w15: J3.3@560,80 580,100 R26.1@580,180 ; 581,139 v1(621,139) ; U6.5@1680,800 1727.53,800 1777.5,750.03 1777.5,630.5 v1(1764,617)
  Bottom w15: v1(621,139) 660,139 722,201 722,264 774,316 1327,316 1608,597 1744,597 v1(1764,617)
OPA_N: R19.2 R20.1 U6.28 | length 509.5
  Top w15: R19.2@1511,1055 1511,976 R20.1@1512,975 1556,931 1766,931 1797,900 U6.28@1910,900
OPA_O: R17.1 R20.2 U6.1 | length 277.4
  Top w15: R20.2@1448,975 1448,959 R17.1@1512,895 1513,894 1564,894 1570,900 U6.1@1680,900
OPA_P: C12.2 R14.1 U6.27 | length 442.7
  Top w15: C12.2@1764,1040 1764,1003 1780,987 1900,987 ; R14.1@1900,1040 1900,987 ; U6.27@1910,875 1953,875 1964,886 1964,964 1941,987 1900,987
OSC1: C38.1 U6.18 Y1.1 | length 287
  Top w15: U6.18@1910,650 2070,650 Y1.1@2080,660 2080,688 C38.1@2140,748
OSC2: C39.1 U6.17 Y1.3 | length 398.6
  Top w15: U6.17@1910,625 1987.13,625 2007,605.13 2126.87,605.13 Y1.3@2172,560
  Top w20: Y1.3@2178.43,549.76 2218.66,590 C39.1@2265,590
  Top w35: Y1.3@2172,560 Y1.3@2178.43,560